# Altium PCB curatin.pcbdoc
Units mm, origin at the board's own origin, x right, y up, seen from the top; angles counter-clockwise.
Board outline 55.4 x 77.4 mm, 2 copper layers (Top Layer, Bottom Layer); 13 components, 32 nets, 63 pads, 3 vias.
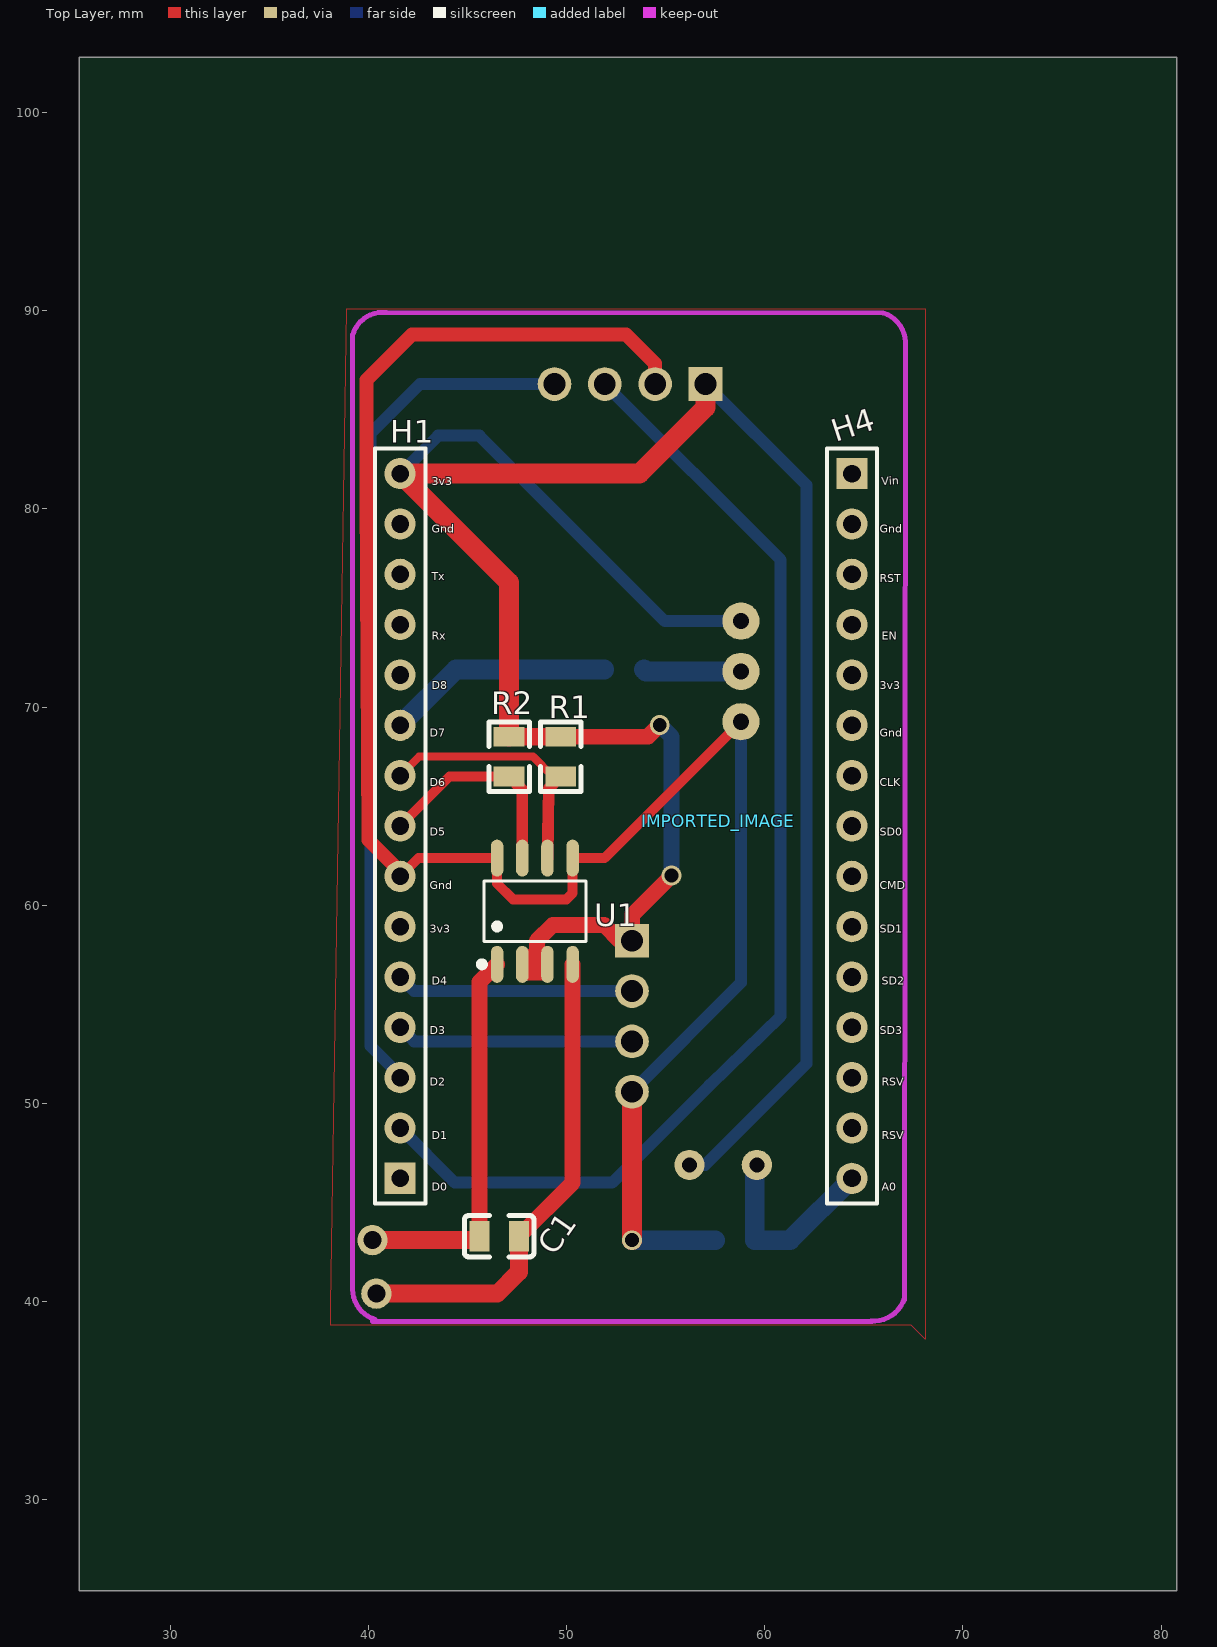
[diagram p0: Top Layer view]
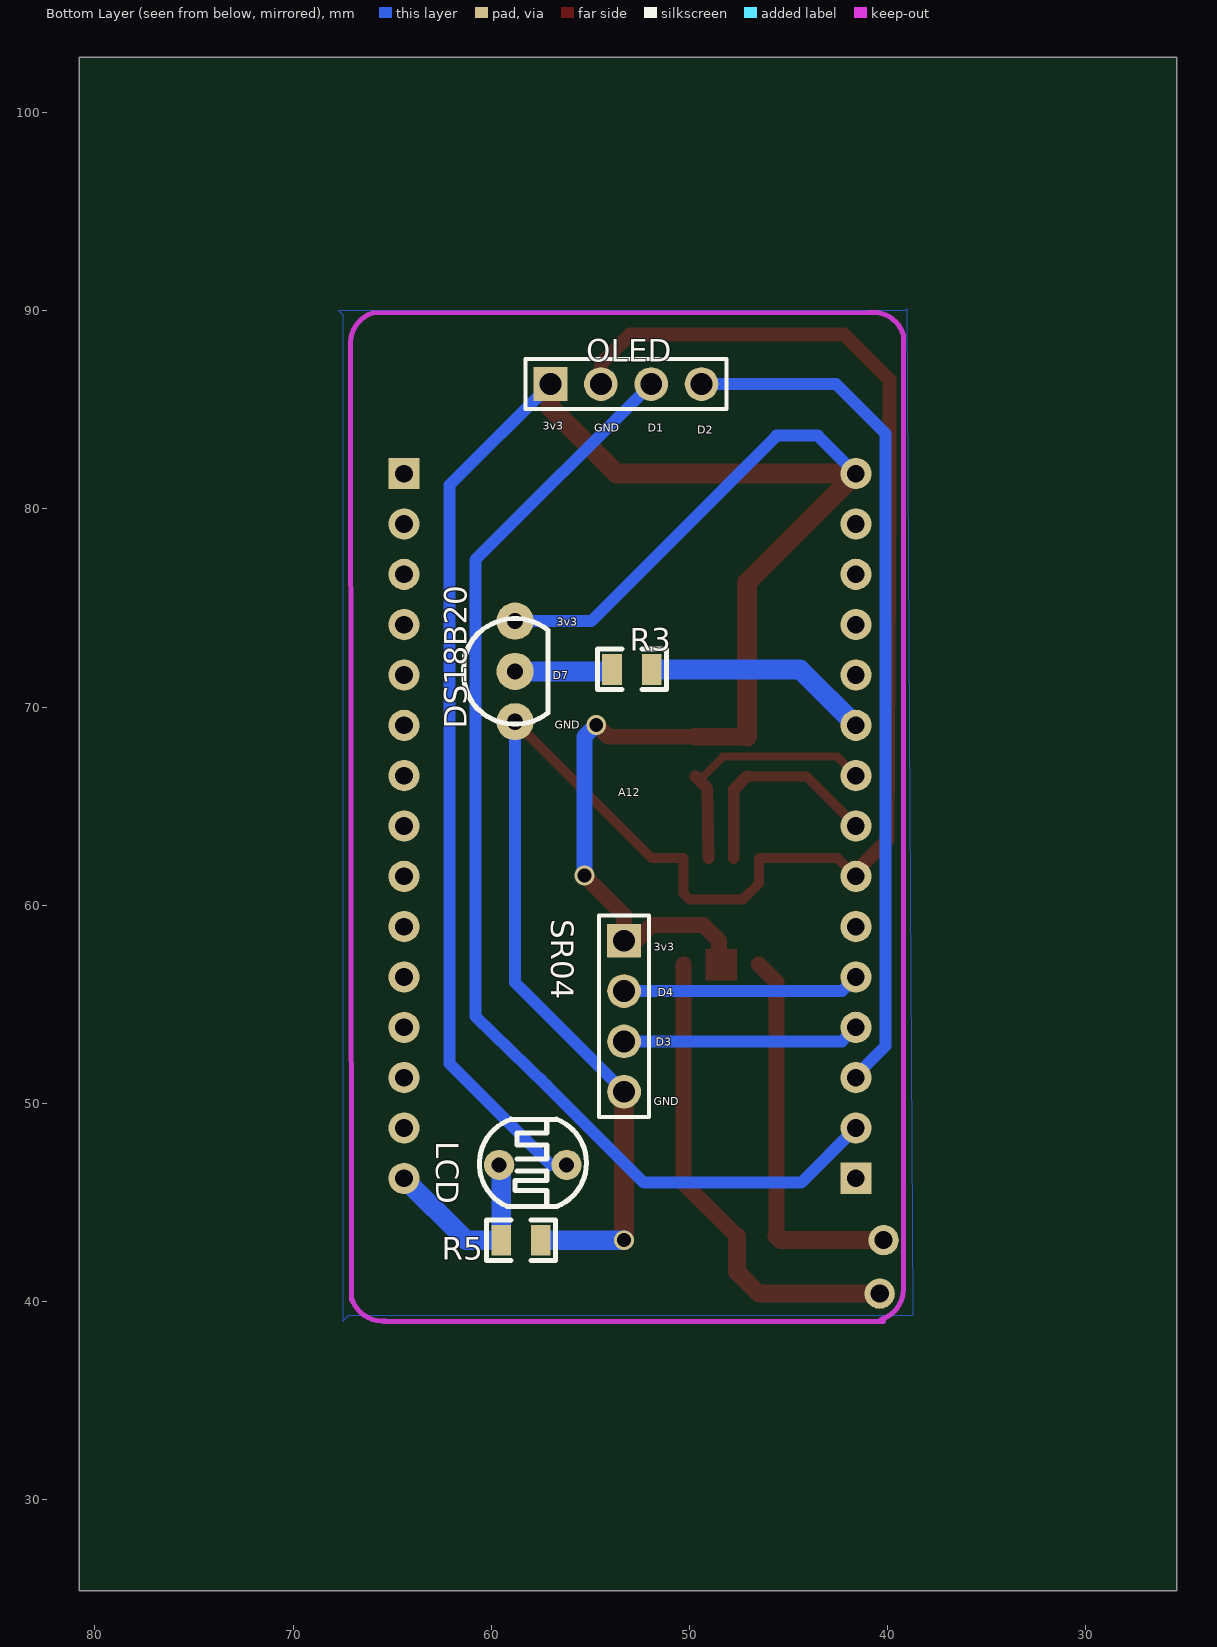
[diagram p1: Bottom Layer view, seen from below]

## Layer stack, top to bottom
Top Layer: signal copper (thickness not stored)
Dielectric: dielectric 0.32, FR-4, Dk 4.8
Bottom Layer: signal copper (thickness not stored)

## Board outline
80.8,25.4 25.4,25.4 25.4,102.8 80.8,102.8

## Components (designator, comment, footprint, x,y, rotation, side; value= is the part's Value field where it differs from the comment)
C1 "0.1u" C0805 46.6,43.3 r0 top
DS18B20 "DS18B20" TO-92-AMMO 58.8,71.8 r270 bottom
H1 "1" HDR-TH_15P-P2.54-V 41.6,64 r90 top
H4 "2" HDR-TH_15P-P2.54-V 64.401,64 r270 top
IMPORTED_IMAGE "IMPORTED_IMAGE" IMPORTED_IMAGE 57.652,64.25 r0 top
LCD "lcd" RES-TH_L5.1-W4.3-P3.40-D0.5 57.9,46.9 r90 bottom
OLED "OLED" HDR-TH_4P-P2.54-V 53.2,86.3 r0 bottom
R1 "10K" R0805#1 49.7,67.5 r270 top
R2 "10k" R0805#1 47.1,67.5 r270 top
R3 "10K" R0805#2 52.9,71.9 r0 bottom
R5 "10K" R0805#2 58.5,43.1 r180 bottom
SR04 "SR04" HDR-TH_4P-P2.54-V 53.3,54.4 r90 bottom
U1 "L9110s" SOP-8_L4.9-W3.9-P1.27-LS6.0-BL 48.4,59.7 r0 top

## Footprints (in the part's own frame and the unit in brackets; to place one, negate y for a bottom-side part, rotate by r counter-clockwise, add the part's x,y. Pads: shape width x height; smd on the part's side, far side on the other; paste and mask are expansions set on the pad)
C0805 [mm]
  rect 1x1.55 smd: 1(-1,0) 2(1,0)
  silkscreen extent -1.75,-1.04 1.75,1.04
HDR-TH_4P-P2.54-V [mm]
  rect 1.7x1.7 hole 1.1: 1(3.81,0)
  round 1.7 hole 1.1: 2(1.27,0) 3(-1.27,0) 4(-3.81,0)
  silkscreen extent -5.08,-1.27 5.08,1.27
HDR-TH_15P-P2.54-V [mil]
  rect 62x62 hole 35: 1(-700,0)
  round 62 hole 35: 2(-600,0) 3(-500,0) 4(-400,0) 5(-300,0) 6(-200,0) 7(-100,0) 8(0,0) 9(100,0) 10(200,0) 11(300,0) 12(400,0) 13(500,0) 14(600,0) 15(700,0)
  silkscreen extent -750,-50 750,50
IMPORTED_IMAGE [mm]
R0805#1 [mm]
  rect 1x1.55 smd: 1(-1,0) 2(1,0)
  silkscreen extent -1.75,-1.02 1.75,1.02
R0805#2 [mm]
  rect 1x1.55 smd: 1(1,0) 2(-1,0)
  silkscreen extent -1.75,-1.02 1.75,1.02
RES-TH_L5.1-W4.3-P3.40-D0.5 [mil]
  round 60 hole 30: 1(0,-66.93) 2(0,66.93)
  silkscreen extent -83,-106 91,106
SOP-8_L4.9-W3.9-P1.27-LS6.0-BL [mm]
  oval 0.63x1.865 smd: 1(-1.905,-2.682) 2(-0.635,-2.682) 3(0.635,-2.682) 4(1.905,-2.682) 5(1.905,2.682) 6(0.635,2.682) 7(-0.635,2.682) 8(-1.905,2.682)
  silkscreen extent -2.82,-2.83 2.58,1.52
TO-92-AMMO [mil]
  round 74 hole 32: 1(100,0) 2(0,0) 3(-100,0)
  silkscreen extent -105,-103 105,65

## Free pads (board coordinates)
  round 1.524 hole 0.914: 1(40.2,43.1) 2(40.4,40.4)

## Via types
v1: diameter 1, hole 0.7, Top Layer to Bottom Layer, 3 vias

## Nets (pads, with @x,y where several pads share a name; then routed paths per layer and width w, separated by ;. In a path a pad name is that pad's centre, name@x,y a point inside that pad or via, vN(x,y) a via of type N, cw(c..) or ccw(c..) an arc to the next point about the centre after c; other vN are vias at no path point)
3V3: DS18B20.3 H1.15 LCD.1 OLED.1 R1.1 R2.1 SR04.1 U1.2 U1.3 | length 126.2
  Top Layer w0.8: 48.5,57.1 48.5,58.2 49.3,59 51.9,59 52.69,58.21 SR04.1 53.3,59.5 v1(55.3,61.5) ; R1.1 54.1,68.5 v1(54.7,69.1)
  Top Layer w0.9: R2.1@47.101,68.5 48.462,68.5 R1.1
  Top Layer w1: R2.1 47.1,76.279 H1.15 53.68,81.78 57.01,85.11 OLED.1@57.01,86.301
  Bottom Layer w0.6: H1.15 43.52,83.7 45.6,83.7 54.96,74.34 DS18B20.3 ; LCD.1 57,46.9 62.1,52 62.1,81.21 OLED.1
  Bottom Layer w0.8: v1(54.7,69.1) 55.3,68.5 v1(55.3,61.5)
A0: H4.15 LCD.2 R5.2 | length 10
  Bottom Layer w1: LCD.2 59.5,46.8 R5.2 61.281,43.1 H4.15
CLK: H4.7
CMD: H4.9
D0: H1.1
D1: H1.2 OLED.3 | length 59.8
  Bottom Layer w0.6: H1.2 44.358,46.001 52.3,46.001 57.5,51.201 ; OLED.3@51.93,86.301 60.799,77.431 60.799,54.398 57.22,50.921
D2: H1.3 OLED.4 | length 43.4
  Bottom Layer w0.6: H1.3 41.6,51.4 40.1,52.9 40.1,83.8 40.7,84.4 42.6,86.3 OLED.4
D3: H1.4 SR04.3 | length 12
  Bottom Layer w0.6: H1.4 42.31,53.13 SR04.3
D4: H1.5 SR04.2 | length 12
  Bottom Layer w0.6: H1.5 42.31,55.67 SR04.2
D5: H1.8 R2.2 U1.7 | length 10.9
  Top Layer w0.5: H1.8 44.1,66.5 R2.2
  Top Layer w0.6: R2.2 47.765,65.835 U1.7
D6: H1.9 R1.2 U1.6 | length 13.3
  Top Layer w0.4: H1.9 42.56,67.5 48.3,67.5 49.3,66.5 R1.2
  Top Layer w0.6: U1.6 49.1,65.9 R1.2
D7: H1.10 R3.2 | length 11.5
  Bottom Layer w1: H1.10 44.42,71.9 R3.2
D8: H1.11
EN: H4.4
GND: DS18B20.1 H1.7 OLED.2 R5.1 SR04.4 U1.5 U1.8 | length 99.4
  Top Layer w0.5: H1.7 42.523,62.383 U1.8 46.495,61.105 47.3,60.3 50,60.3 50.305,60.605 U1.5 51.923,62.383 DS18B20.1
  Top Layer w0.7: H1.7 41.6,61.7 40,63.3 39.9,80.939 39.9,86.499 42.199,88.8 52.999,88.8 54.47,87.33 OLED.2@54.47,86.301
  Top Layer w1: v1(53.3,43.1) SR04.4
  Bottom Layer w0.6: SR04.4 58.8,56.09 DS18B20.1
  Bottom Layer w1: v1(53.3,43.1) R5.1
RST: H4.3
RSV: H4.13 H4.14
RX: H1.12
S$705: 
S$716: 
S$718: 
S$726: 
S$728: 
SD0: H4.8
SD1: H4.10
SD2: H4.11
SD3: H4.12
TX: H1.13
U1_1: C1.1 pad.1 U1.1 | length 19.6
  Top Layer w0.8: C1.1 45.6,56.122 U1.1
  Top Layer w0.9: pad.1 45.4,43.1 C1.1
U1_4: C1.2 pad.2 U1.4 | length 24.3
  Top Layer w0.8: C1.2 50.305,46.005 U1.4
  Top Layer w0.9: pad.2@40.4,40.4 46.5,40.4 47.6,41.5 C1.2
U2_2: DS18B20.2 R3.1 | length 4.9
  Bottom Layer w1: R3.1 54,71.8 DS18B20.2
VIN: H4.1
pads on no net: H1.6 H1.14 H4.2 H4.5 H4.6

## Polygon pours and split planes (outlines as drawn)
GND on Bottom Layer (solid): 39,90.1 39.1,90 67.7,90 67.5,89.8 67.5,39 67.2,39.3 38.7,39.3 38.7,39.6
GND on Top Layer (solid): 38.9,90.1 68.1,90.1 68.1,38.1 67.4,38.8 38.1,38.8 38.1,39.8

## Keep-outs
Keep-Out Layer:
  lines w0.254 net S$705: 39.2,40.6 ccw(c40.818,40.645) 40.343,39.098 ; 39.203,88.763 cw(c40.7,88.362) 40.9,89.9 ; 65.351,39.033 ccw(c65.501,40.644) 67.049,40.174 ; 65.963,89.897 cw(c65.488,88.35) 67.1,88.2

## Other copper
Top Layer:
  rectangle net 3V3: 47.6,56.2 49.2,57.8

## Silkscreen, mask and mechanical layers (free items; w line width, h text height)
Top Overlay:
  text "3v3" at 43.2,81.2 h0.4
  text "Vin" at 65.91,81.2 h0.4 r3
  text "Gnd" at 43.2,78.8 h0.4
  text "Gnd" at 65.8,78.8 h0.4
  text "Tx" at 43.2,76.4 h0.4
  text "RST" at 65.8,76.3 h0.4
  text "Rx" at 43.2,73.4 h0.4
  text "EN" at 65.9,73.4 h0.4
  text "D8" at 43.2,70.9 h0.4
  text "3v3" at 65.8,70.9 h0.4
  text "D7" at 43.1,68.5 h0.4
  text "Gnd" at 65.8,68.5 h0.4
  text "D6" at 43.1,66 h0.4
  text "CLK" at 65.8,66 h0.4
  text "D5" at 43.1,63.5 h0.4
  text "SD0" at 65.8,63.5 h0.4
  text "Gnd" at 43.1,60.8 h0.4
  text "CMD" at 65.8,60.8 h0.4
  text "3v3" at 43.1,58.6 h0.4
  text "SD1" at 65.8,58.6 h0.4
  text "D4" at 43.2,56 h0.4
  text "SD2" at 65.9,56 h0.4
  text "D3" at 43.1,53.5 h0.4
  text "SD3" at 65.8,53.5 h0.4
  text "D2" at 43.1,50.9 h0.4
  text "RSV" at 65.9,50.9 h0.4
  text "D1" at 43.2,48.2 h0.4
  text "RSV" at 65.9,48.2 h0.4
  text "D0" at 43.2,45.6 h0.4
  text "A0" at 65.9,45.6 h0.4
Bottom Overlay:
  text "3v3" at 57.4,84 h0.4
  text "D1" at 52.1,83.9 h0.4
  text "GND" at 54.8,83.9 h0.4
  text "D2" at 49.6,83.8 h0.4
  text "3v3" at 56.7,74.1 h0.4
  text "D7" at 56.9,71.4 h0.4
  text "GND" at 56.8,68.9 h0.4
  text "A12" at 53.6,65.5 h0.4
  text "3v3" at 51.8,57.7 h0.4
  text "D4" at 51.6,55.4 h0.4
  text "D3" at 51.7,52.9 h0.4
  text "GND" at 51.8,49.9 h0.4